# Altium PCB Pannel3.5x2 Ver1.0.PcbDoc (part 2 of 4)
Units mil, origin at the board's own origin, x right, y up, seen from the top; angles counter-clockwise.
Board outline 4133.86 x 2283.46 mil, 4 copper layers (SIGNAL, GROUND, PWR, SIGNAL (Bottom)), stack 61.627 mil thick; 222 components, 165 nets, 808 pads, 673 vias.
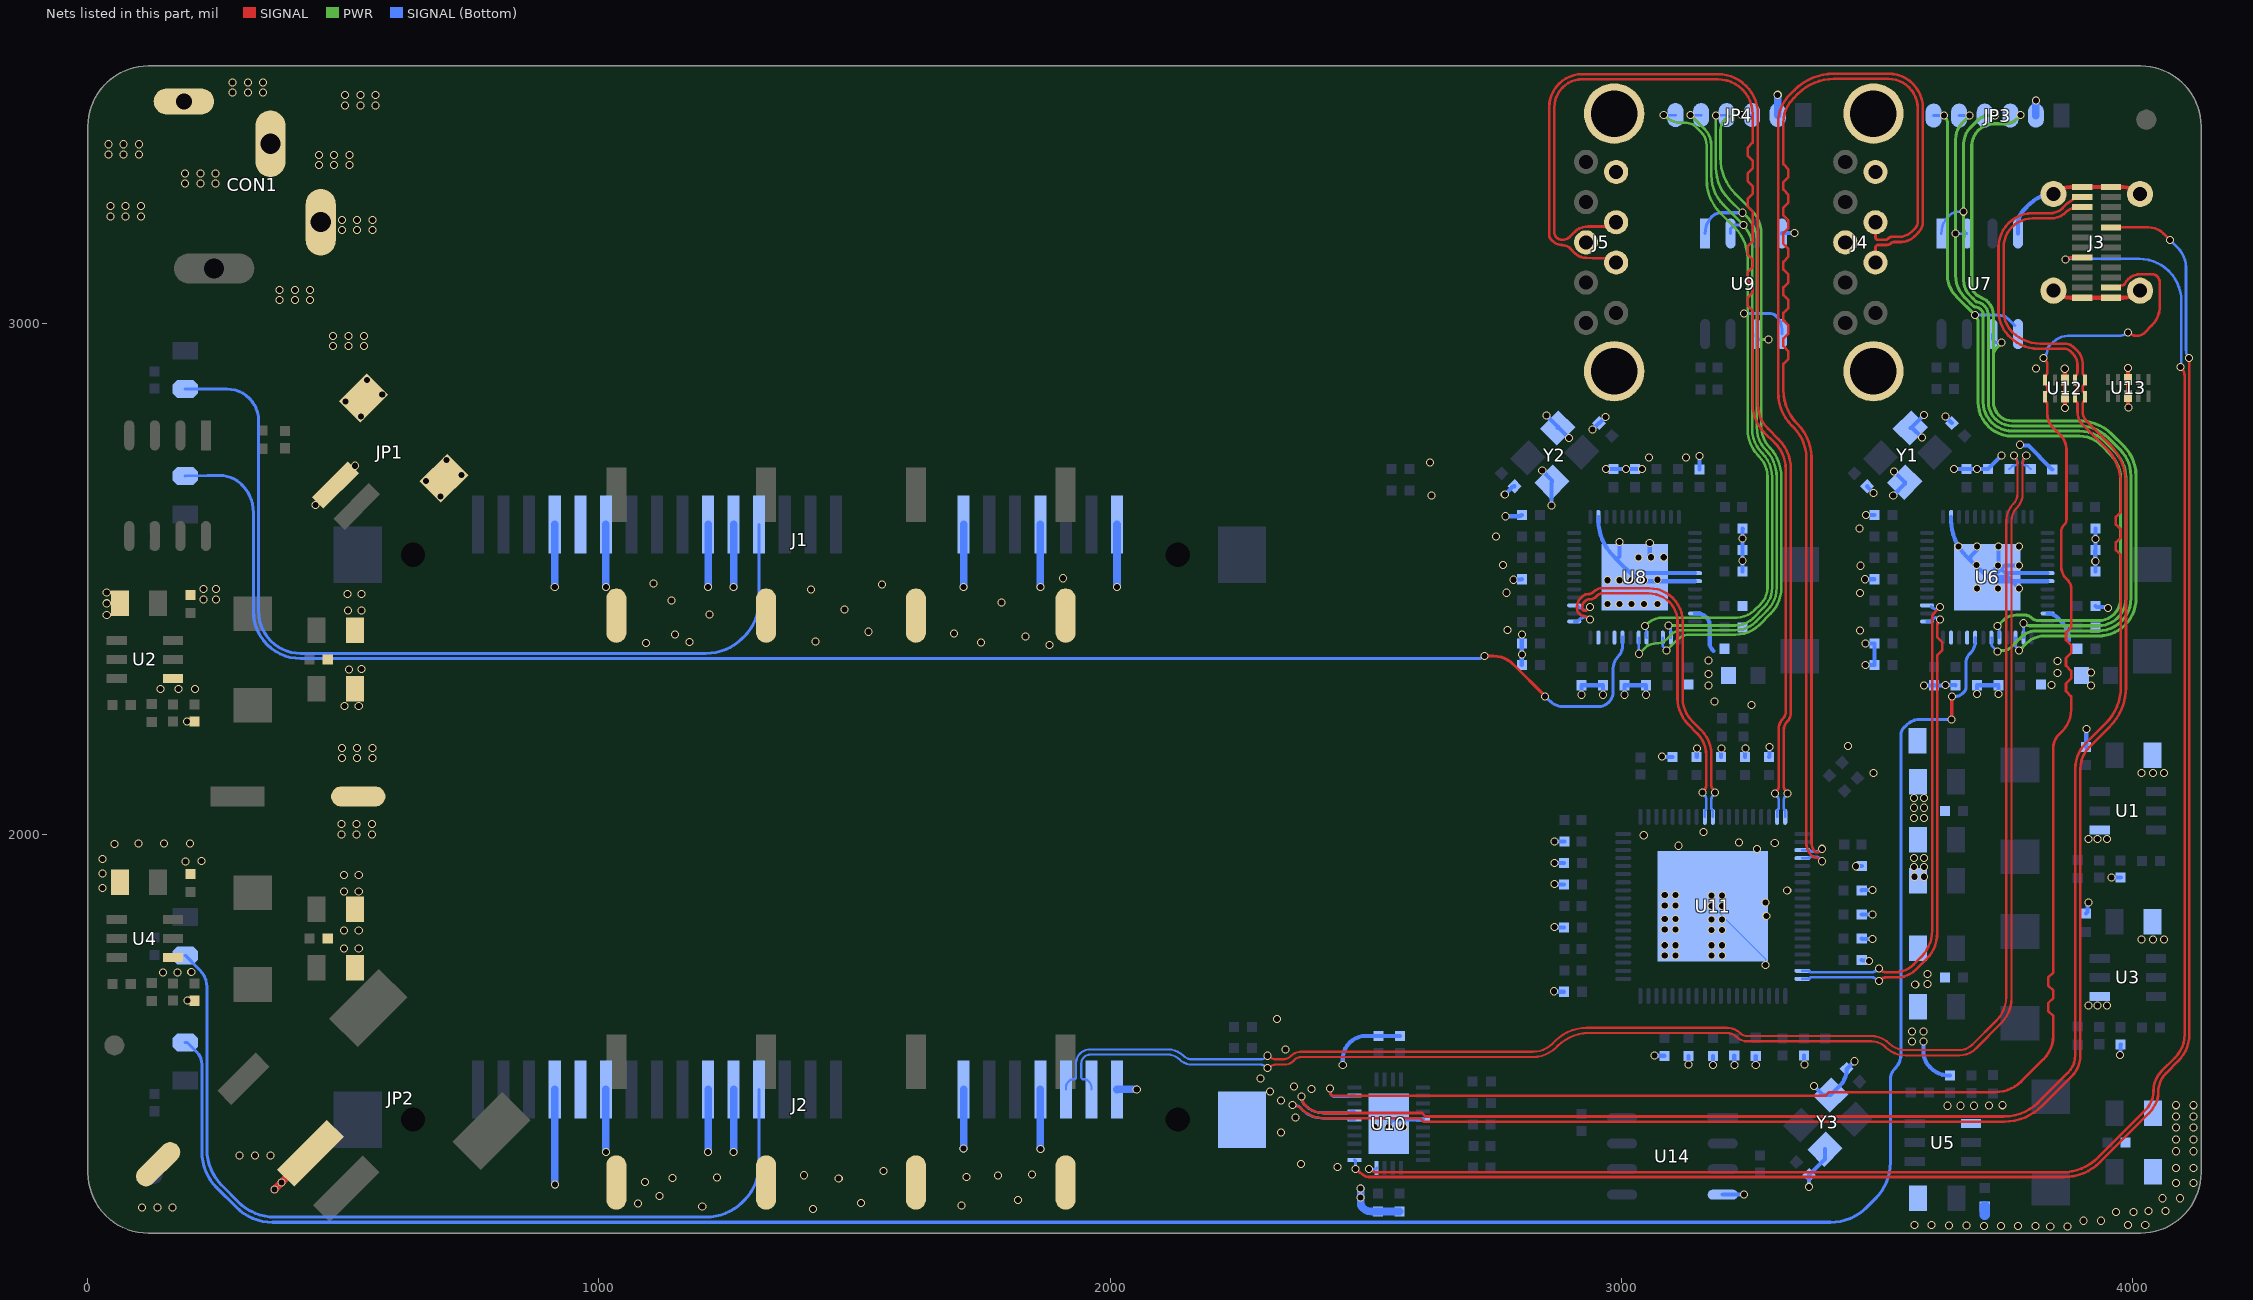
[diagram p4: the nets of this part, all layers, seen from the top]

## Via types
v1: diameter 15.75, hole 11.81, SIGNAL to SIGNAL (Bottom), tented both sides, 673 vias

## Nets (pads, with @x,y where several pads share a name; then routed paths per layer and width w, separated by ;. In a path a pad name is that pad's centre, name@x,y a point inside that pad or via, vN(x,y) a via of type N, cw(c..) or ccw(c..) an arc to the next point about the centre after c; other vN are vias at no path point) (continued)
cap_TX2_N: C40.1 J2.S3 | length 3089.5
  SIGNAL w4.29: v1(2308,1566.83) cw(c2308,1563.98) 2310.02,1565.99 ccw(c2325.04,1581.02) 2325.04,1559.77 2336.81,1559.77 ccw(c2336.81,1584.91) 2336.9,1559.77 ccw(c2336.81,1584.91) 2354.49,1567.04 ccw(c2336.81,1584.91) 2354.54,1567.09 ccw(c2336.81,1584.91) 2354.58,1567.13 cw(c2372.46,1549.18) 2372.46,1574.51 2826.91,1574.51 ccw(c2826.91,1629.09) 2865.5,1590.5 2871.01,1596.01 cw(c2932.53,1534.5) 2932.53,1621.5 3207.01,1621.5 cw(c3207.01,1585.17) 3232.7,1610.86 ccw(c3246.17,1624.33) 3232.74,1610.82 ccw(c3246.17,1624.33) 3246.17,1605.28 3489.55,1605.28 cw(c3489.55,1556.56) 3523.99,1591.01 ccw(c3555.87,1622.87) 3555.87,1577.8 3661,1577.8 ccw(c3661,1613.85) 3686.49,1588.36 3733.85,1635.72 ccw(c3687.56,1682) 3753.02,1682 3753.02,2612.97 cw(c3800.34,2612.97) 3766.88,2646.43 ccw(c3747.63,2665.69) 3774.86,2665.69 3774.86,2723.96 ccw(c3753.61,2723.96) 3768.63,2738.98 cw(c3770.65,2741) v1(3767.8,2741)
  SIGNAL (Bottom) w4.29: J2.S3@1913.43,1500.84 1913.43,1504.19 cw(c1929.93,1504.19) 1918.26,1515.86 1920.38,1517.98 cw(c1926.94,1511.43) 1926.94,1520.69 1929,1520.69 ccw(c1929,1524.98) 1930.35,1520.91 ccw(c1929,1524.98) 1932.03,1521.95 ccw(c1929,1524.98) 1933.07,1523.63 ccw(c1929,1524.98) 1933.29,1524.98 1933.29,1551.93 cw(c1960.59,1551.93) 1941.28,1571.24 1941.36,1571.32 ; 1941.4,1571.35 cw(c1960.61,1552.07) 1960.61,1579.29 2112.79,1579.29 cw(c2112.79,1535.68) 2143.61,1566.53 ; 2143.64,1566.5 ccw(c2159.91,1582.8) 2159.91,1559.77 2294.77,1559.77 ccw(c2294.77,1571.82) 2303.29,1563.3 2305.98,1565.99 cw(c2308,1563.98) v1(2308,1566.83) ; C40.1@3759,2714.43 3764.71,2720.14 cw(c3769.52,2715.32) 3769.52,2722.13 3770.56,2722.13 ccw(c3770.56,2726.42) 3771.92,2722.35 ccw(c3770.56,2726.42) 3773.6,2723.39 ccw(c3770.56,2726.42) 3774.63,2725.06 ccw(c3770.56,2726.42) 3774.86,2726.42 3774.86,2727.77 ccw(c3762.8,2727.77) v1@3771.33,2736.29
cap_TX2_P: C38.1 J2.S2 | length 3089.4
  SIGNAL w4.29: v1(2308,1542.42) ccw(c2308,1545.28) 2310.02,1543.26 cw(c2325.04,1528.23) 2325.04,1549.48 2341.2,1549.48 ccw(c2341.2,1574.3) 2358.75,1556.75 ; 2358.99,1556.99 2361.76,1559.76 cw(c2372.53,1548.99) 2372.53,1564.22 2827.02,1564.22 ccw(c2827.02,1628.83) 2872.7,1583.15 2875.28,1585.72 cw(c2936.79,1524.21) 2936.79,1611.21 3206.9,1611.21 cw(c3206.9,1584.9) 3225.5,1603.5 ccw(c3246.05,1624.05) 3246.05,1594.99 3489.42,1594.99 cw(c3489.42,1556.25) 3516.77,1583.68 cw(c3489.42,1556.25) 3516.81,1583.64 ccw(c3555.8,1622.71) 3555.8,1567.51 3661.06,1567.51 ccw(c3661.06,1613.7) 3693.72,1581.04 3742.86,1630.17 ccw(c3693.48,1679.55) 3763.31,1679.55 3763.31,2612.87 cw(c3800.59,2612.87) 3774.23,2639.23 ccw(c3747.87,2665.59) 3785.14,2665.59 3785.14,2723.96 cw(c3806.39,2723.96) 3791.37,2738.98 ccw(c3789.35,2741) v1(3792.2,2741)
  SIGNAL (Bottom) w4.29: J2.S2@1963.43,1500.84 1963.43,1504.19 ccw(c1946.93,1504.19) 1958.6,1515.86 1956.48,1517.98 ccw(c1949.93,1511.43) 1949.93,1520.69 1947.87,1520.69 cw(c1947.87,1524.98) 1944.83,1521.95 cw(c1947.87,1524.98) 1943.58,1524.98 1943.58,1551.89 cw(c1960.68,1551.89) 1948.59,1563.99 cw(c1960.68,1551.9) 1960.68,1569 2112.72,1569 cw(c2112.72,1535.51) 2136.39,1559.2 ccw(c2159.84,1582.63) 2136.46,1559.13 ccw(c2159.84,1582.63) 2159.76,1549.48 ccw(c2159.84,1582.63) 2159.84,1549.48 2294.77,1549.48 cw(c2294.77,1537.43) 2303.29,1545.95 2305.98,1543.26 ccw(c2308,1545.28) v1(2308,1542.42) ; v1@3788.67,2736.29 ccw(c3797.2,2727.77) 3785.14,2727.77 3785.14,2726.42 ccw(c3789.44,2726.42) 3785.37,2725.06 ccw(c3789.44,2726.42) 3786.4,2723.39 ccw(c3789.44,2726.42) 3788.08,2722.35 ccw(c3789.44,2726.42) 3789.44,2722.13 3790.48,2722.13 cw(c3790.48,2715.32) 3795.29,2720.14 C38.1@3801,2714.43
DAS1: J1.P11
DAS2: J2.P11
GND: C1.2 C2.2 C5.1 C6.1 C7.1 C8.1 C11.2 C12.2 C13.2 C14.2 C15.2 C16.2 C19.1 C20.1 C21.1 C22.1 C25.2 C26.2 C27.2 C28.2 C29.2 C31.1 C32.1 C34.2 C35.2 C45.1 C46.1 C47.1 C49.1 C50.1 C51.1 C52.1 C53.1 C54.1 C55.1 C56.1 C57.1 C58.1 C59.1 C60.1 C61.1 C62.1 C65.2 C66.2 C67.1 C68.1 C69.1 C71.1 C72.1 C73.1 C74.1 C75.1 C76.1 C77.1 C78.1 C79.1 C80.1 C81.1 C82.1 C83.1 C84.1 C87.2 C88.2 C89.1 C90.1 C91.2 C102.1 C103.1 C104.1 C105.1 C106.1 C107.2 C108.2 C109.1 C110.1 C111.1 C112.1 C113.1 C114.1 C115.1 C116.1 C117.1 C118.1 C119.1 C120.1 C121.2 C122.2 CON1.2 CON1.3 CON1.4 E1.2 E2.2 E3.2 E4.2 E5.2 E6.2 E7.2 E8.2 E9.2 E10.2 J1.P5 J1.P6 J1.P10 J1.P12 J1.S1 J1.S4 J1.S7 J2.P5 J2.P6 J2.P10 J2.P12 J2.S1 J2.S4 J2.S7 J2.SH1 J3.A1 J3.A12 J3.B1 J3.B12 J3.SH1 J3.SH2 J3.SH3 J3.SH4 J4.4 J4.7 J4.10 J4.11 J5.4 J5.7 J5.10 J5.11 JP1.0 JP1.2 JP2.2 JP3.2 JP4.2 R3.2 R4.2 R7.2 R8.2 R10.2 R18.1 R19.1 R24.1 R25.1 R32.2 R36.1 R37.1 R39.2 R42.2 U1.1 U2.1 U3.1 U4.1 U5.1 U6.26 U6.42 U6.43 U6.47 U6.49 U7.4 U8.26 U8.42 U8.43 U8.47 U8.49 U9.4 U10.19 U10.29 U11.77 U12.3 U12.8 U13.3 U13.8 U14.4 Y1.2 Y1.4 Y2.2 Y2.4 Y3.2 Y3.4 | length 6583.2
  SIGNAL w6: v1(193.77,2220.41) R4.2@209,2220.41 ; v1(194.75,1674.97) 208.43,1674.97 R8.2@209,1674.41 ; v1(445,2644) 484.13,2683.13 JP1.2@484.37,2683.13 485.13,2683.13 v1(523,2721)
  SIGNAL w8: J3.SH2@3845.35,3063.51 ccw(c3878.62,3096.78) 3878.62,3049.73 J3.B1@3901.65,3049.73 J3.A12@3958.34,3049.73 3981.38,3049.73 ccw(c3981.38,3096.78) J3.SH3@4014.64,3063.51 ; J3.SH1@3845.35,3252.49 cw(c3878.62,3219.22) 3878.62,3266.27 J3.B12@3901.65,3266.27 J3.A1@3958.34,3266.27 3981.38,3266.27 cw(c3981.38,3219.22) J3.SH4@4014.64,3252.49 ; v1(3867.52,2910.78) 3867.89,2910.41 U12.3@3867.89,2888.78 U12.8@3867.89,2855.91 3867.89,2834.28 v1(3868.26,2833.91) ; v1(3991.26,2911.87) 3991.63,2911.5 U13.3@3991.63,2889.87 U13.8@3991.63,2857 3991.63,2835.37 v1(3992,2835)
  SIGNAL w15: v1(365,1305) v1(379,1319) 435.75,1375.75 JP2.2@435.75,1376.13
  SIGNAL (Bottom) w2: U11.77@3179,1859 3201,1837 3282.34,1755.66 v1(3282.34,1744.63)
  SIGNAL (Bottom) w8: v1(2455,1548.38) 2455,1560.1 cw(c2500.63,1560.1) 2468.34,1592.34 cw(c2500.63,1560.1) 2500.63,1605.73 R37.1@2525,1605.73 R36.1@2567,1605.73 ; U10.29@2545,1434 2552.87,1441.87 U10.19@2611.93,1441.87 ; v1(2772,2665) 2785.75,2678.75 cw(c2791.05,2673.44) C88.2@2791.05,2680.95 ; v1(2773.29,2622.24) 2798.63,2622.24 ccw(c2798.63,2631.66) C71.1@2805.28,2625 ; v1(2789,2498) 2789.5,2498.5 2804.78,2498.5 C73.1@2805.28,2499 ; C82.1@2805.28,2331 v1(2805.28,2351.72) C74.1@2805.28,2373 v1(2805.28,2391.28) ; v1(2845.35,2711.65) 2864.43,2692.57 Y2.2@2864.43,2689.11 2863.04,2687.71 v1(2863.04,2642.96) ; v1(2854,2819) 2875.57,2797.43 Y2.4@2875.57,2794.89 2878.11,2794.89 v1(2897.65,2775.35) ; v1(2868,1693) ccw(c2870.41,1695.41) 2870.41,1692 C103.1@2887.57,1692 ; v1(2869,1819) ccw(c2871.41,1821.41) 2871.41,1818 C119.1@2887.57,1818 ; v1(2869,1903) ccw(c2871.41,1905.41) 2871.41,1902 C91.2@2887.57,1902 ; v1(2869,1944) C102.1@2887.57,1944 ; v1(2869,1986) R32.2@2888.54,1986 ; v1(2922,2273) C80.1@2922,2291.57 C77.1@2964,2291.57 v1(2964,2273) ; v1(2944,2792.03) C87.2@2956.47,2804.53 ; U8.26@2955.13,2621.11 2955.13,2615.29 ccw(c3055.13,2615.29) 2984.42,2544.58 U8.49@2991,2538 ; C87.2@2956.47,2804.53 2957.5,2804.53 v1(2968.97,2816) ; v1(2970.37,2714.43) C78.1@2985,2714.43 v1(3009.43,2714.43) C76.1@3027,2714.43 v1(3040.43,2714.43) ; v1(2996.18,2572.2) 2996.18,2543.18 U8.49@2991,2538 ; v1(3006,2273) C81.1@3006,2291.57 C75.1@3048,2291.57 v1(3048,2273) ; v1(3055.64,2570.12) 3055.64,2545.36 U8.49@3060,2541 ; v1(3065,1567) 3065.22,1566.78 3084.28,1566.78 C112.1@3084.5,1566.57 ; v1(3080,2152) ccw(c3081.37,2153.37) 3081.37,2151.43 C116.1@3100.3,2151.43 ; v1(3131,1550) 3131.4,1550.4 3131.4,1566.17 C117.1@3131.8,1566.57 ; U8.47@3144.11,2432.13 3147.36,2432.13 cw(c3147.36,2404.36) 3167,2424 cw(c3152.29,2409.29) 3173.09,2409.29 3173.09,2370.29 ccw(c3199.99,2378.99) 3180,2359 ; U8.43@3144.11,2495.13 3045.01,2495.13 cw(c3045.01,2522.01) U8.49@3026,2503 ; U8.42@3144.11,2510.87 3045.01,2510.87 ccw(c3045.01,2483.99) U8.49@3026,2503 ; C109.1@3147.5,2151.43 3147.5,2166.79 cw(c3149.21,2166.79) v1(3148,2168) ; R25.1@3153,2713.32 v1(3153,2740) ; v1(3179,1549) C110.1@3179,1566.57 ; C120.1@3194.7,2151.43 3195.14,2151.87 3195.14,2167.41 v1(3195.58,2167.85) ; U14.4@3198.43,1295 v1(3240,1295) ; v1(3221,1549) R39.2@3221,1567.43 ; C72.1@3237.44,2514 3237.33,2514.11 3237.33,2535.11 v1(3237.22,2535.22) 3237.22,2555.78 C83.1@3237.44,2556 v1(3237.44,2578.56) 3237.44,2596.87 3238,2597.44 C67.1@3237.44,2598 ; C111.1@3242,2151.43 3242,2169.59 cw(c3245.41,2169.59) 3243,2172 v1(3243,2167.85) ; v1(3263,1549) C106.1@3263,1566.57 ; C104.1@3289.2,2151.43 ccw(c3287.27,2153.36) 3290,2153.36 v1(3290,2171) ; U9.4@3314,3175.43 3314.57,3176 v1(3339,3176) ; R42.2@3357,1567.43 3357.5,1566.93 3357.5,1550.5 v1(3358,1550) ; v1(3367.53,1310.47) C108.2@3367.53,1333.47 3398.43,1364.38 Y3.2@3398.43,1384.11 ; v1@3376.53,1507.9 v1@3377.64,1509 ; v1(3377,1507.43) 3394.54,1489.89 Y3.4@3409.57,1489.89 3427.09,1507.41 ccw(c3393.5,1541) 3440.38,1533.36 C107.2@3441,1541 v1(3456,1556) ; v1(3458.72,1937.55) 3458.79,1937.63 3470.36,1937.63 C105.1@3470.43,1937.7 ; C115.1@3470.43,1754 3471.38,1753.06 3483.61,1753.06 v1(3484.56,1752.11) ; C118.1@3470.43,1796 3470.93,1795.5 3490.5,1795.5 v1(3491,1795) ; C113.1@3470.43,1843.3 3470.58,1843.15 3490.85,1843.15 v1(3491,1843) ; C114.1@3470.43,1890.5 3470.68,1890.75 3490.75,1890.75 v1(3491,1891) ; v1@3475,2374 ccw(c3477.41,2376.41) v1(3477.41,2373) C53.1@3495.28,2373 C62.1@3495.28,2331 v1(3478,2331) ; v1(3476.41,2499) C56.1@3495.28,2499 ; v1(3478.41,2625) C54.1@3495.28,2625 ; C66.2@3481.05,2680.95 3481.05,2680.45 3493,2668.5 v1(3493,2668) ; v1(3532,2663) 3554.43,2685.43 Y1.2@3554.43,2689.11 3553.89,2689.11 v1(3533.35,2709.65) ; Y1.4@3565.57,2794.89 Y1.4@3566.89,2794.89 ; v1(3588.17,2775.87) 3569.15,2794.89 Y1.4@3566.89,2794.89 ; v1(3591,1595) 3591,1576 ccw(c3636.87,1576) 3604.41,1543.59 ; v1(3592,2820) Y1.4@3566.89,2794.89 ; v1(3592.52,2291) 3592.81,2291.28 3611.72,2291.28 C58.1@3612,2291.57 3612.28,2291.28 v1@3634.43,2291.28 ; 3604.44,1543.56 ccw(c3642.35,1581.48) 3642.35,1527.86 R10.2@3643,1527.86 ; v1(3634,2292) 3634.22,2291.78 3653.78,2291.78 C52.1@3654,2291.57 ; v1(3634,2817) C65.2@3646.47,2804.53 ; U6.26@3645.13,2621.11 3645.13,2615.29 ccw(c3745.13,2615.29) 3674.42,2544.58 U6.49@3683,2536 ; v1(3650.56,2714.56) 3650.62,2714.49 3674.94,2714.49 C55.1@3675,2714.43 v1(3696,2714.43) C49.1@3717,2714.43 v1@3741.89,2739.32 ; v1(3695.84,2274.75) 3695.92,2274.83 3695.92,2291.49 C61.1@3696,2291.57 C51.1@3738,2291.57 v1(3738,2274.75) ; v1(3695.84,2563) 3695.84,2555.92 3683,2543.08 U6.49@3683,2536 ; v1(3737,2526) 3732.04,2521.04 U6.49@3732.04,2519.04 ; U6.49@3738,2525 v1(3738,2563) ; v1@3741.9,2739.33 ccw(c3739.22,2742) v1@3743,2742 ; v1@3742.5,2742.5 v1@3744,2744 ; U7.4@3776,3175.43 3776,3193.83 cw(c3814.53,3193.83) 3787.29,3221.07 3799.86,3233.64 cw(c3845.35,3188.15) J3.SH1@3845.35,3252.49 ; v1(3778.33,2481) U6.49@3764.2,2495.13 ; v1(3778.33,2526) 3750.14,2526 U6.49@3743.18,2519.04 ; v1(3780,2762.14) 3781.48,2760.66 3796.41,2760.66 3818.18,2738.89 3818.18,2738.15 R19.1@3843,2713.32 ; U6.47@3834.11,2432.13 cw(c3834.11,2406.14) 3849.21,2427.3 3850.89,2426.1 cw(c3843.95,2416.39) 3853.37,2423.72 ccw(c3859.66,2428.67) 3853.97,2423.04 3860.44,2416.58 cw(c3822.86,2379) 3863.54,2413.19 cw(c3822.86,2379) 3874.54,2391.35 cw(c3822.86,2379) 3876,2379.02 ; U6.43@3834.11,2495.13 U6.49@3764.2,2495.13 ; U6.42@3834.11,2510.87 3751.34,2510.87 U6.49@3743.18,2519.04 ; C20.1@3909,1844.72 3912.1,1847.82 3912.1,1865.52 v1(3913.58,1867) ; C6.1@3909,2170.72 3909.5,2171.22 3909.5,2205.5 v1(3910,2206) ; C57.1@3927.44,2447 3930.04,2444.39 3950.78,2444.39 v1(3952.26,2442.91) ; C50.1@3927.44,2514 3927.33,2514.11 3927.33,2534.11 v1(3927.22,2534.22) 3927.22,2555.78 C60.1@3927.44,2556 3927.72,2556.28 3927.72,2577.72 v1(3928,2578) 3927.72,2578.28 3927.72,2597.72 C45.1@3927.44,2598 ; v1(3958.72,1915.57) 3958.93,1915.36 3976.79,1915.36 R3.2@3977,1915.14 ; v1(3976,1568) 3976.5,1568.5 3976.5,1588.64 R7.2@3977,1589.14 ; U8.49@2991,2538 U8.49@3026,2503 ; U6.49@3683,2536 U6.49@3716,2503 ; U6.49@3716,2503 3723.87,2495.13 U6.49@3764.2,2495.13 ; U6.49@3716,2503 3756.33,2503 U6.49@3764.2,2495.13 ; U6.49@3716,2503 U6.49@3722.13,2509.13 ; U6.49@3722.13,2509.13 U6.49@3732.04,2519.04 ; U6.49@3722.13,2509.13 3733.26,2509.13 U6.49@3743.18,2519.04 ; U6.49@3732.04,2519.04 U6.49@3743.18,2519.04
  SIGNAL (Bottom) w15: J2.P12@913.43,1500.84 913.43,1315.77 914,1315.2 v1(914,1315) ; v1(913.43,2483.97) J1.P12@913.43,2606.09 ; v1(1013.43,1378.72) J2.P10@1013.43,1500.84 ; v1(1013.43,2483.97) J1.P10@1013.43,2606.09 ; v1(1213.43,1378.72) J2.P6@1213.43,1500.84 ; v1(1213.43,2483.97) J1.P6@1213.43,2606.09 ; v1(1263.43,1378.72) J2.P5@1263.43,1500.84 ; v1(1263.43,2483.97) J1.P5@1263.43,2606.09 ; v1(1713,1385) 1713,1385.2 1713.43,1385.63 J2.S7@1713.43,1500.84 ; v1(1713.43,2483.97) J1.S7@1713.43,2606.09 ; J2.S4@1863.43,1500.84 1863.43,1384.77 1864,1384.2 v1(1864,1384) ; v1(1863.43,2483.97) J1.S4@1863.43,2606.09 ; J2.S1@2013.43,1500.84 2013.59,1501 v1(2052,1501) ; v1(2013.43,2483.97) J1.S1@2013.43,2606.09 ; v1(2490,1307) v1(2490,1289.87) 2490,1279.45 ccw(c2504.55,1279.45) 2494.26,1269.16 ccw(c2511.47,1286.36) 2511.47,1262.03 C90.1@2524,1262.03 C89.1@2566,1262.03 ; JP4.2@3306,3407 v1(3306,3446.8) ; JP3.2@3811,3406 v1(3811,3436)
  SIGNAL (Bottom) w20: 3711,1255.83 C32.1@3711,1272.28
  other v1: 3839.17,1232.5 3873.17,1232.5 3709.17,1233.5 3743.17,1233.5 3776.17,1233.5 3810.17,1233.5 3641.17,1234.5 3675.17,1234.5 3573.17,1235.5 3607.17,1235.5 3991,1236 4025,1236 3904,1244 3938,1244 3968,1261 4002,1261 4031,1263 4065,1263 1419,1267 106,1270 136,1270 166,1270 1202,1272 1708.78,1274.01 1076,1278 1513,1279 1819.98,1284.6 4059,1288 4093,1288 1118.45,1292.41 4085,1318 4119,1318 1090,1320 1469,1327 1144,1328 1230.77,1328.64 1719.09,1329.76 1401,1333 1780.68,1332.82 1847.02,1334.5 1557,1341 4085,1347 4119,1347 2444.98,1348.78 2373.23,1355.4 297,1372 327,1372 357,1372 4085,1380 4119,1380 4085,1403 4119,1403 2334.46,1416.36 4085,1426 4119,1426 2517,1427 2545,1427 2574,1427 2362.27,1446.2 4085,1448 4119,1448 3638,1469 3664,1469 3690,1469 3719,1469.57 3746,1470 4085,1470 4119,1470 2334.3,1478.91 2312.28,1496.57 2394.13,1501.53 2359.87,1506.99 2293.9,1522.5 2343,1579 3569,1595 3569,1614 3591,1614 2326.01,1638.59 3914,1665 3932,1665 3950,1665 3575,1706 3599,1707 3599,1727 147,1730 175,1730 202.36,1730.36 3085,1763 3106,1763 3176,1763 3197,1763 501,1777 530,1777 3085,1783 3106,1783 3176,1783 3197,1783 4018,1794 4040,1794 4062,1794 501,1812 530,1812 3176,1813 3197,1813 3085,1814 3106,1814 3176,1833 3197,1833 3085,1834 3106,1834 3283.59,1839.84 3176,1860 3197,1860 3085,1861 3106,1861 3281.86,1866.85 3176,1880 3197,1880 3085,1881 3106,1881 501,1888 530,1888 3324.58,1890.47 29,1895 3573.5,1916.99 3592.5,1916.99 501,1920 530,1920 29,1923 3573,1936 3592,1936 191,1947 222,1948 29,1952 3573,1954 3592,1954 3265.66,1971.63 3112.11,1977.59 52,1981 99,1982 149,1982 200,1982 3300.17,1983.4 3230.49,1984.03 3914,1991 3932,1991 3950,1991 3043.91,1998.2 496,2000 526,2000 556,2000 3160.35,2004.82 496,2020 526,2020 556,2020 3573,2032 3592,2032 3573,2052 3592,2052 3573,2071 3592,2071 3493.55,2119.87 4018,2120 4040,2120 4062,2120 497,2149 527,2149 557,2149 497,2169 527,2169 557,2169 3443.11,2172.89 502,2251 530,2251 3254.61,2252.9 3182.37,2259.87 142,2284 177,2284 210,2284 3171,2291 3918.87,2291.28 3842,2292 3171,2314 3853,2316 3919,2317 511,2322 535,2323 3853,2339 3171,2340 1881,2370 1092,2374 1747.24,2375.48 1177,2376 1423.12,2377.1 1834,2387 1149,2391 1694.41,2393.25 1527.16,2396.25 2777,2399.39 3467,2398.96 37,2429 1216,2430 509,2438 535,2438 1480,2440 2973,2451 2996,2451 3020,2451 3044,2451 3071,2451 37,2452 1787.84,2453.92 1142,2457 226,2459 251,2459 508,2470 535,2470 3467.01,2472.19 37,2473 2775.7,2472.58 1415,2479 226,2480 251,2480 3695.84,2481 3737,2481 1554,2489 1107,2491 2973,2497 2996,2497 3020,2497 3044,2497 3071,2498 1907.8,2500.98 3468.23,2525.42 2768.77,2527.2 3695,2527 3033.4,2541.6 3058,2542 3083,2542 3660,2563 3778.33,2563 2755.15,2582.78 3465.93,2598.59 690,2661 2629.04,2662.57 662,2691 731,2703 2625.72,2727.62 702,2732 3053.88,2737.11 3126.12,2737.11 3743.39,2741 534,2817 504,2847 576,2860 546,2889 3811.39,2911.55 480,2955 510,2955 540,2955 480,2975 510,2975 540,2975 375,3045 405,3045 435,3045 375,3065 405,3065 435,3065 497,3182 527,3182 557,3182 497,3202 527,3202 557,3202 44,3209 74,3209 104,3209 44,3229 74,3229 104,3229 190,3273 220,3273 250,3273 190,3293 220,3293 250,3293 452,3309 482,3309 512,3309 452,3329 482,3329 512,3329 40,3330 70,3330 100,3330 40,3350 70,3350 100,3350 503,3426 533,3426 563,3426 503,3446 533,3446 563,3446 283,3451 313,3451 343,3451 283,3471 313,3471 343,3471
GPIO0-B: JP3.5 U6.2 U7.2 | length 1491.7
  PWR w6: v1(3681.38,3406) 3667.62,3392.24 ccw(c3700.84,3359.02) 3653.86,3359.02 3653.86,3175.14 v1(3654,3175) 3654,3093.65 ccw(c3716.13,3093.65) 3672.2,3049.72 3681.54,3040.38 ; 3681.57,3040.35 ccw(c3702.84,3061.58) 3681.62,3040.3 ccw(c3702.84,3061.58) 3681.77,3040.14 3688.82,3033.22 ccw(c3693.02,3037.51) 3692.73,3031.51 cw(c3692.13,3015.65) 3703.33,3026.89 ; 3703.37,3026.86 cw(c3692.13,3015.65) 3708,3015.65 cw(c3692.13,3015.65) 3707.95,3014.4 ccw(c3713.93,3013.96) 3707.93,3013.96 3707.99,3002.03 cw(c3677.94,3001.47) 3708,3001.47 3708,2845.58 ccw(c3764.58,2845.58) 3724.57,2805.57 ccw(c3764.58,2845.58) 3764.58,2789 3889,2789 3896.25,2789 cw(c3896.26,2719.26) 3945.54,2768.61 cw(c3896.26,2719.26) 3945.6,2768.54 3966.29,2747.85 cw(c3916.34,2697.9) 3986.98,2697.9 3986.98,2461.57 cw(c3933.41,2461.57) 3971.29,2423.69 ; v1(3787.01,2412.94) ccw(c3798.94,2424.87) 3793.78,2408.81 ccw(c3798.94,2424.87) 3798.94,2408 3933.41,2408 ccw(c3933.41,2461.57) 3971.27,2423.67
  SIGNAL (Bottom) w5: v1(3654,3175) 3675.57,3175 U7.2@3676,3175.43 ; U6.2@3786.87,2384.89 3786.94,2384.96 3786.94,2412.87 v1(3787.01,2412.94)
  SIGNAL (Bottom) w6: JP3.5@3661,3406 v1(3681.38,3406)
GPIO0-C: JP4.5 U8.2 U9.2 | length 1290.4
  PWR w5: v1(3092.44,2408.48) 3223.19,2408.48 ccw(c3223.19,2456.81) 3257.35,2422.62 ; v1(3135.62,3407) 3162.81,3379.81 cw(c3130.97,3347.97) 3176,3347.97 3176,3289.38 ccw(c3258.38,3289.38) 3200.11,3231.15 v1@3237,3194.26 ; v1@3238,3192 cw(c3194.54,3148.54) 3251.01,3172.8 cw(c3194.54,3148.54) 3256,3148.54 3256,2793.03 ccw(c3322.58,2793.03) 3275.5,2745.95 cw(c3228.73,2699) 3275.57,2745.88 ; 3257.36,2422.64 3279.36,2444.64 ; 3275.61,2745.84 cw(c3228.73,2699) 3295,2699 3295,2482.38 cw(c3241.62,2482.38) 3279.38,2444.65
  SIGNAL (Bottom) w5: v1@3096.32,2401.7 3096.32,2396.06 3096.87,2395.51 U8.2@3096.87,2384.89 ; v1(3135.62,3407) JP4.5@3156,3407
  SIGNAL (Bottom) w6: U9.2@3214,3175.43 3214,3185.32 3220.32,3191.64 v1(3238.6,3191.64)
GPIO1-B: JP3.3 U6.3 U7.6 | length 1609.7
  PWR w6: 3728,3013.53 3728,2938 ; 3728,3015.65 ccw(c3692.13,3015.65) 3717.54,3040.97 ccw(c3692.13,3015.65) 3717.49,3041.02 3713.71,3044.8 3709.09,3047.26 ccw(c3692.13,3015.65) 3708.9,3047.36 3696.72,3053.85 cw(c3699.55,3059.14) 3695.32,3054.88 3692.14,3058.06 cw(c3707.92,3073.84) 3685.6,3073.84 3685.6,3346.56 cw(c3729.17,3346.56) 3698.37,3377.37 cw(c3729.17,3346.56) 3729.17,3390.13 3752.57,3390.13 ccw(c3752.57,3418.93) 3772.93,3398.55 v1(3781.38,3407) ; v1@3744.5,2961.5 3732.95,2949.95 ccw(c3744.9,2938) 3728,2938 ; v1(3778.33,2359.42) 3792.62,2373.71 ; 3792.65,2373.74 cw(c3827.12,2339.2) 3827.12,2388 3933.41,2388 ccw(c3933.41,2461.57) 3985.4,2409.52 ; 3896.21,2809 3884,2809 3764.58,2809 cw(c3764.58,2845.58) 3738.71,2819.71 cw(c3764.58,2845.58) 3728,2845.58 3728,2938 ; 3896.26,2809 cw(c3896.26,2719.26) 3959.64,2782.79 cw(c3896.26,2719.26) 3959.75,2782.68 3982.85,2759.58 cw(c3924.71,2701.37) 3982.94,2759.49 cw(c3924.71,2701.37) 4006.98,2701.41 4007,2688 4007,2461.62 cw(c3933.36,2461.62) 3985.43,2409.55
  SIGNAL (Bottom) w5: U6.3@3771.12,2384.89 3771.12,2367.72 3778.33,2360.51 v1(3778.33,2359.42)
  SIGNAL (Bottom) w6: U7.6@3726,2978.57 3726,2968.32 3732.32,2962 v1(3744,2962)
GPIO1-C: JP4.3 U8.3 U9.6 | length 1369.1
  PWR w5: v1(3088.33,2359.42) 3109.96,2381.04 cw(c3132.74,2358.26) 3132.74,2390.48 3223.19,2390.48 ccw(c3223.19,2456.81) 3270.06,2409.88 ; v1(3235.62,3407) 3223.02,3407 ccw(c3223.02,3377.98) 3202.51,3398.51 ccw(c3223.02,3377.98) 3194,3377.98 3194,3323.42 ccw(c3294,3323.42) 3223.29,3252.71 3254,3222 cw(c3205.72,3173.72) 3274,3173.72 3274,2968 ; 3270.09,2409.91 3292.09,2431.91 ccw(c3241.62,2482.38) 3292.14,2431.96 ccw(c3241.62,2482.38) 3313,2482.38 3313,2699 ccw(c3228.73,2699) 3305.97,2732.69 3304.61,2735.82 ccw(c3244.67,2709.84) 3290.9,2756 cw(c3331.72,2796.81) 3290.83,2756.07 cw(c3331.72,2796.81) 3274,2796.81 3274,2968 ; v1(3288,2968) 3274,2968
  SIGNAL (Bottom) w5: U8.3@3081.12,2384.89 3081.12,2367.72 3088.33,2360.51 v1(3088.33,2359.42) ; v1(3235.62,3407) JP4.3@3256,3407
  SIGNAL (Bottom) w6: U9.6@3264,2978.57 3264,2974.32 3270.32,2968 v1(3288,2968)
GPIO2-B: JP3.6 U6.5 U7.5 | length 1585.2
  PWR w6: v1(3631.38,3406) cw(c3615.39,3390.01) 3635.74,3399.88 cw(c3615.39,3390.01) 3638,3390.01 3638,3093.66 ccw(c3695.66,3093.66) 3654.89,3052.89 v1(3692.13,3015.65) cw(c3677.94,3001.47) 3696.86,3008.14 cw(c3677.94,3001.47) 3698,3001.47 3698,2845.58 ccw(c3764.58,2845.58) 3717.5,2798.5 ccw(c3764.58,2845.58) 3764.58,2779 3896.26,2779 cw(c3896.26,2719.26) 3938.5,2761.5 3957.74,2742.26 cw(c3911.29,2695.81) 3976.98,2695.81 3976.98,2461.57 cw(c3933.41,2461.57) 3964.22,2430.76 cw(c3933.41,2461.57) 3933.41,2418 3815.65,2418 cw(c3815.65,2436.46) 3802.61,2423.39 ccw(c3789.54,2410.35) 3789.54,2428.82 3772.34,2428.82 ccw(c3772.34,2392.64) 3746.76,2418.22 v1(3736.16,2407.62)
  SIGNAL (Bottom) w5: v1(3736.16,2407.62) 3736.16,2404.72 3739.07,2401.81 3739.07,2385.44 U6.5@3739.62,2384.89
  SIGNAL (Bottom) w6: JP3.6@3611,3406 v1(3631.38,3406) ; v1(3692.13,3015.65) 3738.84,3015.65 cw(c3738.84,2990.43) 3756.67,3008.26 U7.5@3769.68,2995.26
GPIO2-C: JP4.6 U8.5 U9.5 | length 1448.8
  PWR w5: v1(3046.16,2407.62) 3048.54,2409.99 cw(c3082,2376.53) 3082,2423.86 3225.85,2423.86 ccw(c3225.85,2472.15) 3260,2438 3273,2451 ccw(c3241.62,2482.38) 3286,2482.38 3286,2699 ccw(c3228.73,2699) 3269.23,2739.5 3267.79,2740.94 ; v1(3083,3407) v1@3084.27,3405.73 ; v1@3084.28,3405.72 ccw(c3118.32,3439.78) 3118.32,3391.63 3128.3,3391.63 cw(c3128.3,3367.55) 3145.32,3384.57 3156.16,3373.73 cw(c3129.99,3347.57) 3167,3347.57 3167,3280.89 ccw(c3260.89,3280.89) 3194.5,3214.5 3222,3187 cw(c3161.64,3126.64) 3222.04,3186.96 cw(c3161.64,3126.64) 3247,3126.64 v1@3247,3019.08 ; v1@3247,3017 3247,2793.03 ccw(c3322.58,2793.03) 3267.15,2741.65 3267.27,2741.52 cw(c3263.6,2738.12) 3267.36,2741.42 3267.79,2740.94 ; 3274.99,2732.76 3267.79,2740.94
  PWR w6: v1(3239.89,3019.08) 3241.76,3017.21 3246.29,3017.21 v1@3246.5,3017
  SIGNAL (Bottom) w5: v1@3049.07,2401.81 3049.07,2385.44 U8.5@3049.62,2384.89 ; v1(3083,3407) JP4.6@3106,3407
  SIGNAL (Bottom) w6: v1(3239.89,3019.08) 3290.06,3019.08 cw(c3290.06,3000.09) 3303.47,3013.53 ; 3303.48,3013.52 cw(c3278.1,2988.13) 3314,2988.13 U9.5@3314,2978.57
GPIO3-B: JP3.4 U6.6 U7.1 | length 1648.9
  PWR w6: 3688.27,3047.79 3682.12,3053.94 cw(c3712.08,3083.87) 3669.73,3083.87 3669.73,3168.28 3669.87,3168.42 3669.87,3181.58 3669.73,3181.72 v1(3669.73,3217.98) 3669.73,3350.43 cw(c3716.33,3350.43) 3683.38,3383.38 3697.03,3397.03 cw(c3718.69,3375.37) 3718.69,3406 v1(3731.38,3406) ; 3688.32,3047.74 3690.86,3045.24 3691.05,3045.05 ; 3691.11,3044.99 3693.4,3042.74 ccw(c3697.57,3047.06) 3696.5,3041.15 cw(c3692.13,3015.65) 3710.42,3033.95 ; 3710.46,3033.91 cw(c3692.13,3015.65) 3718,3015.65 cw(c3692.13,3015.65) 3717.95,3014.01 ccw(c3723.94,3013.64) 3717.94,3013.62 3717.96,3008.05 ; 3718,3008.05 3718,2845.58 ccw(c3764.58,2845.58) 3731.64,2812.64 ; 3731.67,2812.61 ccw(c3764.58,2845.58) 3764.58,2799 3886,2799 3896.25,2799 cw(c3896.26,2719.26) 3952.58,2775.7 cw(c3896.26,2719.26) 3952.64,2775.64 3954.64,2773.64 3975.81,2752.47 ; v1(3736.16,2357.58) 3738.03,2359.44 3747,2359.44 ccw(c3747,2380.95) 3762.19,2365.73 3771.75,2375.29 3771.81,2375.29 3783.17,2386.64 cw(c3810.58,2359.23) 3800.92,2396.78 cw(c3810.58,2359.23) 3810.58,2398 3933.41,2398 ccw(c3933.41,2461.57) 3978.35,2416.61 ; 3975.85,2752.44 cw(c3924.71,2701.37) 3996.98,2701.37 3996.98,2461.57 cw(c3933.41,2461.57) 3978.37,2416.63
  SIGNAL (Bottom) w5: U7.1@3626,3175.43 cw(c3673.52,3175.43) 3633.34,3200.8 cw(c3673.52,3175.43) 3639.92,3209.03 3641.54,3210.65 cw(c3659.3,3192.86) 3659.3,3218 v1(3669.73,3217.98) ; U6.6@3723.87,2384.89 3724.37,2384.39 3724.37,2369.37 v1(3736.16,2357.58)
  SIGNAL (Bottom) w6: JP3.4@3711,3406 v1(3731.38,3406)
GPIO3-C: JP4.4 U8.6 U9.1 | length 1440.1
  PWR w5: v1(3034.92,2353.22) 3046.11,2364.41 cw(c3067.85,2342.67) 3067.85,2373.41 ccw(c3067.85,2404.16) 3089.59,2382.42 3098.12,2390.95 cw(c3118.72,2370.35) 3118.72,2399.48 3223.19,2399.48 ccw(c3223.19,2456.81) 3263.69,2416.24 ; v1(3185.62,3406.5) 3185.01,3390.36 ccw(c3194,3390) 3185,3390 3185,3304.77 ccw(c3273.77,3304.77) 3211,3242 v1(3237,3216) 3237.74,3216 3244.87,3208.87 3247.87,3205.87 ; 3247.89,3205.86 cw(c3237,3195) 3249.25,3204.29 3251.37,3201.49 cw(c3198.02,3161) 3264.5,3169.18 3264.69,3167.62 cw(c3223.57,3162.57) 3265,3162.57 3265,2796.76 ccw(c3331.58,2796.76) 3284.5,2749.68 ; 3263.73,2416.27 3283.86,2436.41 ccw(c3235.25,2485.02) 3283.9,2436.44 3285.7,2438.24 ccw(c3241.62,2482.38) 3285.76,2438.31 ccw(c3241.62,2482.38) 3304,2482.38 3304,2699 ccw(c3228.73,2699) 3297.78,2728.97 ; 3284.52,2749.65 cw(c3244.67,2709.84) 3296.34,2732.28 3297.77,2728.97
  SIGNAL (Bottom) w5: U8.6@3034.4,2384.37 3034.4,2353.74 v1(3034.92,2353.22) ; v1(3185.62,3406.5) 3205.5,3406.5 JP4.4@3206,3407
  SIGNAL (Bottom) w6: U9.1@3164,3175.43 3164,3175.5 cw(c3211.34,3175.5) 3170.84,3200.02 cw(c3211.34,3175.5) 3177.84,3208.95 ; 3177.87,3208.98 cw(c3194.82,3192.02) 3194.82,3216 v1(3237,3216)
GPIO4-B: LED2.2 U6.8 | length 4807.8
  SIGNAL w6: v1(3645.85,2224.93) 3646.42,2225.5 3646.42,2269.27 v1(3647,2269.85)
  SIGNAL (Bottom) w6: LED2.2@190.61,1592.84 194.36,1592.84 212.96,1574.24 cw(c188.72,1550) 223,1550 223,1379.42 ccw(c323,1379.42) 252.29,1308.71 290.71,1270.29 ccw(c361.42,1341) 361.42,1241 3409.26,1241 ccw(c3409.26,1341) 3479.97,1270.29 3496.92,1287.23 ccw(c3426.2,1357.94) 3526.2,1357.94 3526.2,1518.38 cw(c3561.63,1518.38) 3536.57,1543.43 ; 3536.59,1543.45 ccw(c3511.23,1568.79) 3547.08,1568.79 3547.08,2195.08 cw(c3565.91,2195.08) 3552.6,2208.39 3558.11,2213.9 cw(c3584.73,2187.29) 3584.73,2224.93 v1(3645.85,2224.93) ; v1(3647,2269.85) 3653.29,2269.85 ccw(c3653.29,2290.56) 3667.93,2275.92 3670.97,2278.95 ccw(c3663.64,2286.27) 3674,2286.27 3674,2333 cw(c3705.37,2333) 3683.18,2355.18 ccw(c3661.01,2377.37) 3692.38,2377.37 U6.8@3692.38,2384.89
GPIO4-C: LED4.2 U8.8 | length 3248.7
  SIGNAL w6: v1(2731.96,2348.61) 2750.37,2348.61 cw(c2750.37,2295.45) 2772.02,2344 cw(c2750.37,2295.45) 2787.96,2333.04 v1(2851,2270)
  SIGNAL (Bottom) w6: LED4.2@190.61,2700.82 234.36,2702.13 257.42,2702.13 cw(c257.42,2639.9) 298.7,2686.47 301.26,2683.9 301.42,2683.9 cw(c246.91,2629.39) 324,2629.39 324,2436.18 ccw(c416.18,2436.18) 351,2371 351.03,2370.97 ccw(c416.18,2436.18) 416.18,2344 2724.71,2344 2729.32,2348.61 v1(2731.96,2348.61) ; v1(2851,2270) 2861,2260 ccw(c2885.14,2284.14) 2885.14,2250 2955.26,2250 ccw(c2955.26,2278.74) 2975.58,2258.42 ccw(c2955.26,2278.74) 2984,2278.74 2984,2324.71 cw(c3015.37,2324.71) 2993.18,2346.88 ccw(c2971.01,2369.08) 3002.38,2369.08 U8.8@3002.38,2384.89
  SIGNAL (Bottom) w8: U8.8@3002.38,2384.89 U8.8@3002.44,2384.95
GPIO5-B: U6.9
GPIO5-C: U8.9
GPIO6-B: U6.11
GPIO6-C: U8.11
HOT1: J1.P4 LED3.2 | length 1785.1
  SIGNAL (Bottom) w6: LED3.2@190.62,2871.11 272.35,2871.11 cw(c272.35,2809.46) 315.91,2853.09 ; 315.98,2853.02 cw(c272.35,2809.46) 334,2809.46 334,2436.18 ccw(c416.18,2436.18) 358.07,2378.07 ; 358.11,2378.04 ccw(c416.18,2436.18) 416.18,2354 1209.58,2354 ccw(c1209.58,2454) 1280.29,2383.29 1284.14,2387.14 ccw(c1213.43,2457.85) 1313.43,2457.85 J1.P4@1313.43,2606.09
HOT2: J2.P4 LED1.2 | length 1750.7
  SIGNAL (Bottom) w6: LED1.2@190.62,1763.13 219.11,1734.65 cw(c185.56,1701.1) 233,1701.1 233,1383.56 ccw(c333,1383.56) 262.29,1312.85 294.85,1280.29 ccw(c365.56,1351) 365.56,1251 1209.58,1251 ccw(c1209.58,1351) 1280.29,1280.29 1284.14,1284.14 ccw(c1213.43,1354.85) 1313.43,1354.85 J2.P4@1313.43,1500.84
HSD1_N: U8.13 U11.10 | length 735.6
  SIGNAL w5.1: v1@2937.03,2420.75 2933.66,2424.11 ccw(c2926.48,2416.93) 2926.48,2427.08 cw(c2926.48,2437.23) 2919.31,2430.05 2917.79,2431.58 cw(c2928.43,2442.22) 2913.38,2442.22 2913.38,2445.52 cw(c2936.14,2445.52) 2920.04,2461.62 2923.77,2465.34 cw(c2934.92,2454.19) 2927.31,2468.01 cw(c2934.92,2454.19) 2934.92,2469.96 ccw(c2934.92,2485.73) 2946.07,2474.58 ; v1@2937.03,2420.75 ccw(c2939,2422.72) v1(2939,2419.93) ; v1@2939.94,2421.76 v1@2941,2421.76 ; 2946.09,2474.6 cw(c2962.36,2458.29) 2962.36,2481.33 3054.18,2481.33 cw(c3054.18,2415.38) 3100.82,2462.01 3101.45,2461.37 cw(c3056.68,2416.6) 3120,2416.6 3120,2265.94 ccw(c3181.94,2265.94) 3138.14,2222.14 3155.75,2204.53 cw(c3106.38,2155.16) 3176.2,2155.16 3176.2,2095.37 ccw(c3188.41,2095.37) 3179.78,2086.73 v1@3182.54,2083.97 ; v1@3182.54,2083.97 cw(c3180.56,2082) v1(3183.35,2082)
  SIGNAL (Bottom) w5.1: U8.13@2907.89,2416.39 2914.02,2416.39 ccw(c2914.02,2418.57) 2915.57,2417.03 ccw(c2914.02,2418.57) 2916.21,2418.57 U8.13@2916.64,2419.37 ; U8.13@2916.65,2419.38 cw(c2921.12,2416.92) 2920.02,2421.9 ccw(c2917.73,2432.13) 2920.87,2422.13 2929.14,2424.72 ; 2929.93,2424.9 cw(c2930.7,2419.86) v1@2934.1,2423.66 ; v1@2934.27,2423.51 ccw(c2937.56,2427.41) 2934.45,2423.37 v1(2939,2419.93) ; U11.10@3179,2034.2 3179,2044.78 ccw(c3174.22,2044.78) 3177.6,2048.16 cw(c3180.98,2051.54) 3176.2,2051.54 3176.2,2068.63 cw(c3188.41,2068.63) v1@3179.78,2077.27
HSD1_P: U8.15 U11.9 | length 670.1
  SIGNAL w5.1: 2932.18,2438.67 cw(c2928.58,2442.28) 2928.58,2437.18 cw(c2928.58,2442.28) 2924.97,2438.68 cw(c2928.58,2442.28) 2923.48,2442.28 2923.48,2445.47 cw(c2936.27,2445.47) 2927.22,2454.52 2928.02,2455.32 cw(c2939,2444.34) 2935.91,2459.55 cw(c2939,2444.34) 2939,2459.86 2939.1,2459.86 ccw(c2939.1,2475.63) 2950.25,2464.48 2952.89,2467.11 cw(c2962.82,2457.18) 2962.82,2471.23 3053.34,2471.23 cw(c3053.34,2413.34) 3094.27,2454.27 cw(c3056.54,2416.54) 3109.9,2416.54 3109.9,2265.9 ccw(c3181.83,2265.9) 3130.92,2215.08 ccw(c3181.83,2265.9) 3130.97,2215.03 3148.5,2197.5 cw(c3106.01,2155.01) 3166.1,2155.01 3166.1,2095.37 cw(c3153.89,2095.37) 3162.52,2086.73 v1@3159.76,2083.97 ; 2932.18,2438.68 v1@2937.03,2443.52 ; v1@2937.03,2443.52 cw(c2939,2441.55) v1(2939,2444.34) ; v1(3158.95,2082) cw(c3161.74,2082) v1@3159.76,2083.97
  SIGNAL (Bottom) w5.1: U8.15@2916.21,2445.69 2916.65,2444.89 ccw(c2921.12,2447.35) 2919.98,2442.38 cw(c2917.73,2432.13) 2923.55,2440.86 2926.39,2438.99 ccw(c2929.2,2443.24) 2931.72,2438.81 ; v1@3162.52,2077.27 cw(c3153.89,2068.63) 3166.1,2068.63 3166.1,2051.54 cw(c3161.32,2051.54) 3164.7,2048.16 ccw(c3168.08,2044.78) 3163.3,2044.78 U11.9@3163.3,2034.2
HSD2_N: J5.2 U11.19 | length 2288.5
  SIGNAL w5.1: 2866.62,3159.91 ccw(c2883.45,3176.77) 2883.45,3152.95 cw(c2883.45,3129.13) 2900.24,3146.02 cw(c2883.45,3129.13) 2900.29,3145.97 2903.9,3142.36 2909.58,3136.68 ccw(c2930.9,3158) 2930.93,3127.85 2931.03,3127.85 cw(c2931.04,3122.75) 2931.37,3127.84 2944.44,3127 2969.62,3127 cw(c2969.62,3098.32) 2974.05,3126.66 cw(c2969.62,3098.32) J5.2@2989.9,3118.6 ; 2866.61,3159.93 2862.75,3163.78 cw(c2872.05,3173.08) 2858.9,3173.08 2858.9,3422.44 cw(c2923.46,3422.44) 2877.81,3468.09 2877.99,3468.27 cw(c2923.64,3422.62) 2878.06,3468.34 cw(c2923.64,3422.62) 2923.64,3487.18 3188.74,3487.18 cw(c3188.74,3409.06) 3243.98,3464.3 3244.15,3464.13 ; 3244.18,3464.1 cw(c3188.75,3408.73) 3267.1,3408.73 3267.1,2840.82 ccw(c3333.82,2840.82) 3286.64,2793.64 3307.87,2772.42 cw(c3249.97,2714.52) 3331.85,2714.52 3331.85,2238.24 cw(c3306.76,2238.24) 3324.5,2220.5 ccw(c3340.43,2204.57) 3317.9,2204.57 3317.9,2093.37 ccw(c3330.11,2093.37) v1@3321.48,2084.73
  SIGNAL (Bottom) w5.1: U11.19@3320.7,2034.2 3320.7,2044.78 ccw(c3315.92,2044.78) 3319.3,2048.16 cw(c3322.68,2051.54) 3317.9,2051.54 3317.9,2066.63 cw(c3330.11,2066.63) 3321.48,2075.27 v1@3324.24,2078.03 ; v1@3324.24,2078.03 ccw(c3322.26,2080) v1(3325.05,2080)
HSD2_P: J5.3 U11.18 | length 2290.3
  SIGNAL w5.1: 2873.36,3167.45 cw(c2883.96,3178.01) 2869,3178.01 2869,3422.31 cw(c2923.77,3422.31) 2885.02,3461.02 ; 2873.4,3167.41 ccw(c2883.96,3178.01) 2883.96,3163.05 2885.54,3163.05 ccw(c2885.54,3181.82) 2898.81,3168.55 2903.87,3173.61 ; 2885.07,3461.07 cw(c2923.77,3422.31) 2923.77,3477.08 3188.57,3477.08 cw(c3188.57,3408.66) 3236.96,3457.04 cw(c3188.57,3408.66) 3257,3408.66 3257,3396 3257,3353 3247,3343 3247,3328 3257,3318 3257,3303 3247,3293 3247,3278 3257,3268 3257,3253 3247,3243 3247,3228 3257,3218 3257,3159.5 3247,3149.5 3247,3134.5 3257,3124.5 3257,3109.5 3247,3099.5 3247,3084.5 3257,3074.5 3257,3059.5 3247,3049.5 3247,3034.5 3257,3024.5 3257,2996 3257,2840.78 ccw(c3333.71,2840.78) 3279.42,2786.58 ccw(c3333.71,2840.78) 3279.47,2786.53 3300.61,2765.39 cw(c3249.57,2714.36) 3321.75,2714.36 3321.75,2238.32 cw(c3306.57,2238.32) 3317.3,2227.59 ccw(c3340.24,2204.65) 3307.8,2204.65 3307.8,2093.37 cw(c3295.59,2093.37) v1@3304.22,2084.73 ; 2903.9,3173.64 2909.58,3179.32 ; 2909.61,3179.35 cw(c2930.9,3158) 2922.72,3187.02 2924.69,3187.57 cw(c2935,3151) 2935,3189 2969.62,3189 ccw(c2969.62,3217.68) 2974.05,3189.34 ccw(c2969.62,3217.68) J5.3@2989.9,3197.4
  SIGNAL (Bottom) w5.1: v1(3300.65,2080) ccw(c3303.44,2080) v1@3301.46,2078.03 ; v1@3301.46,2078.03 3304.22,2075.27 cw(c3295.59,2066.63) 3307.8,2066.63 3307.8,2051.54 cw(c3303.02,2051.54) 3306.4,2048.16 ccw(c3309.78,2044.78) 3305,2044.78 U11.18@3305,2034.2
HSD3_N: J4.2 U11.23 | length 2253.3
  SIGNAL w5.1: 3334.27,2798.73 cw(c3400.61,2865) 3306.84,2865 3306.84,3392.32 cw(c3383.63,3392.32) 3306.84,3392.44 cw(c3383.63,3392.32) 3329.25,3446.53 cw(c3383.63,3392.32) 3329.33,3446.62 3338.9,3456.18 cw(c3415.76,3379.32) 3338.99,3456.27 cw(c3415.76,3379.32) 3415.76,3488.02 3522.62,3488.02 cw(c3522.62,3420.88) 3570.09,3468.35 3570.26,3468.19 cw(c3522.64,3420.58) 3589.98,3420.58 3589.98,3198.41 cw(c3560.64,3198.41) 3581.39,3177.67 3573.32,3169.6 cw(c3547.4,3195.53) 3547.4,3158.87 3534.11,3158.87 ccw(c3534.11,3148.65) 3526.89,3155.87 cw(c3519.83,3162.94) 3519.83,3152.95 3502.28,3152.95 ccw(c3502.28,3147.85) 3498.67,3151.46 ccw(c3502.28,3147.85) 3497.18,3147.85 J4.2@3497.18,3118.6 ; 3334.31,2798.69 3337.38,2795.62 cw(c3277.94,2736.18) 3362,2736.18 3362,1982.49 ccw(c3395.29,1982.49) 3363.5,1972.62 ccw(c3395.29,1982.49) 3371.75,1958.96 3373.27,1957.44 ccw(c3380.47,1964.64) 3380.47,1954.45 cw(c3380.47,1944.27) v1@3387.67,1951.48 ; v1@3387.67,1951.47 3391.03,1948.12 ccw(c3393,1950.09) v1(3393,1947.3)
  SIGNAL (Bottom) w5.1: U11.23@3354.2,1953.5 3364.78,1953.5 ccw(c3364.78,1958.28) 3368.16,1954.9 cw(c3371.54,1951.52) 3371.54,1956.3 3379.63,1956.3 cw(c3379.63,1944.09) v1@3388.27,1952.72
HSD3_P: J4.3 U11.22 | length 2255.3
  SIGNAL w5.1: v1(3392.97,1971.71) ccw(c3392.97,1968.92) 3391,1970.89 3386.15,1966.05 cw(c3382.55,1969.65) 3382.55,1964.55 cw(c3382.55,1969.65) 3378.94,1966.05 cw(c3395.46,1982.56) 3373.18,1975.53 cw(c3395.46,1982.56) 3372.1,1982.56 3372.1,2736.36 ccw(c3278.37,2736.36) 3344.65,2802.64 3344.41,2802.88 cw(c3410.71,2869.18) 3316.94,2869.18 3316.94,2905 3316.94,2920 3326.94,2930 3326.94,2945 3316.94,2955 3316.94,2970 3326.94,2980 3326.94,2995 3316.94,3005 3316.94,3020 3326.94,3030 3326.94,3045 3316.94,3055 3316.94,3070 3326.94,3080 3326.94,3095 3316.94,3105 3316.94,3120 3326.94,3130 3326.94,3145 3316.94,3155 3316.94,3176 3326.94,3186 3326.94,3201 3316.94,3211 3316.94,3226 3326.94,3236 3326.94,3251 3316.94,3261 3316.94,3276 3326.94,3286 3326.94,3301 3316.94,3311 3316.94,3360 3316.94,3392.28 cw(c3383.72,3392.28) 3336.5,3439.5 3345.93,3448.93 cw(c3415.92,3378.95) 3415.92,3477.92 3522.46,3477.92 cw(c3522.46,3420.5) 3563.05,3461.12 ; J4.3@3497.18,3197.4 3497.18,3168.15 ccw(c3502.28,3168.15) 3498.67,3164.54 ccw(c3502.28,3168.15) 3502.28,3163.05 3515.6,3163.05 ccw(c3515.6,3173.15) 3522.74,3166.01 cw(c3529.88,3158.87) 3529.88,3168.97 3544.14,3168.97 ccw(c3544.14,3203.39) 3568.49,3179.05 3574.18,3184.75 ccw(c3560.43,3198.5) 3579.88,3198.5 3579.88,3420.5 ccw(c3522.46,3420.5) 3563.08,3461.09
  SIGNAL (Bottom) w5.1: U11.22@3354.2,1969.2 3364.78,1969.2 cw(c3364.78,1964.42) 3368.16,1967.8 ccw(c3371.54,1971.18) 3371.54,1966.4 3379.63,1966.4 ccw(c3379.63,1978.61) v1@3388.27,1969.98
HSD4_N: U6.13 U11.38 | length 967.7
  SIGNAL w5.1: v1@3508.92,1716.81 cw(c3516.85,1708.88) 3516.85,1720.1 3540.04,1720.1 ccw(c3540.04,1770.94) 3575.99,1734.99 3596.8,1755.8 ccw(c3545.38,1807.22) 3618.1,1807.22 3618.1,2335.5 3618.1,2350.5 3628.1,2360.5 3628.1,2375.5 3618.1,2385.5 3618.1,2412.5 ; v1@3621.18,2415.01 ccw(c3628.6,2407.58) 3618.1,2407.58 cw(c3635.56,2407.58) v1(3623.21,2419.93)
  SIGNAL (Bottom) w5.1: U11.38@3354.2,1717.3 3364.78,1717.3 ccw(c3364.78,1722.08) 3368.16,1718.7 cw(c3371.54,1715.32) 3371.54,1720.1 3490.63,1720.1 cw(c3490.63,1707.89) 3499.27,1716.52 v1@3502.03,1713.76 ; v1@3502.03,1713.76 ccw(c3504,1715.74) v1(3504,1712.95) ; U6.13@3597.89,2416.39 3604.02,2416.39 ccw(c3604.02,2418.57) 3605.57,2417.03 ccw(c3604.02,2418.57) 3606.21,2418.57 U6.13@3606.64,2419.37 ; U6.13@3606.65,2419.38 cw(c3611.12,2416.92) 3610.02,2421.9 ccw(c3607.73,2432.13) 3613.57,2423.42 ; 3613.58,2423.43 cw(c3616.39,2419.17) 3615.48,2424.19
HSD4_P: U6.15 U11.37 | length 948.6
  SIGNAL w5.1: v1@3508.92,1733.49 ccw(c3516.85,1741.42) 3516.85,1730.2 3535.86,1730.2 ccw(c3535.86,1781.04) 3571.81,1745.09 3586.7,1759.98 ccw(c3535.28,1811.41) 3608,1811.41 3608,2417 ccw(c3602.9,2417) 3607.95,2417.74 cw(c3623.21,2419.93) 3608,2422.47 cw(c3624.07,2422.47) 3612.71,2433.83 v1(3623.21,2444.34)
  SIGNAL (Bottom) w5.1: U11.37@3354.2,1733 3364.78,1733 cw(c3364.78,1728.22) 3368.16,1731.6 ccw(c3371.54,1734.98) 3371.54,1730.2 3490.63,1730.2 ccw(c3490.63,1742.41) 3499.27,1733.78 v1@3502.03,1736.54 ; v1@3502.03,1736.54 cw(c3504,1734.56) v1(3504,1737.35) ; U6.15@3606.21,2445.69 3606.65,2444.89 ccw(c3611.12,2447.35) 3609.98,2442.38 cw(c3607.73,2432.13) 3613.59,2440.83 ccw(c3616.39,2445.1) 3615.49,2440.08
IN_CC1: J3.A5 U10.1 | length 3492.6
  SIGNAL w5.1: v1(2480,1345) ccw(c2517.24,1382.24) 2488.11,1338.37 2497.47,1332.15 ccw(c2506,1345) 2506,1329.58 3866.02,1329.58 ccw(c3866.02,1429.58) 3936.73,1358.87 4031.73,1453.86 ccw(c3987.12,1498.56) 4031.82,1453.95 ccw(c3987.12,1498.56) 4044.08,1471.29 4047.12,1477.62 ccw(c4018.62,1491.38) 4050.27,1491.38 4050.27,1494.79 cw(c4104.32,1494.79) 4066.09,1533 4089.52,1556.42 ccw(c4037.18,1608.82) 4089.61,1556.51 ccw(c4037.18,1608.82) 4111.24,1608.82 4111.24,2931.76 v1(4111,2932) ; J3.A5@3958.34,3187.53 4031.12,3187.53 cw(c4031.12,3145.65) 4060.71,3175.29 ; 4060.74,3175.26 v1(4073,3163)
  SIGNAL (Bottom) w5.1: U10.1@2478.07,1363.14 2478.61,1363.14 2480,1361.75 v1(2480,1345) ; v1(4073,3163) 4088.84,3147.16 cw(c4050.6,3108.93) 4104.68,3108.93 4104.68,2947.27 ccw(c4126.27,2947.27) 4106.58,2938.41 ccw(c4126.27,2947.27) v1(4111,2932)
IN_CC2: J3.B5 U10.28 | length 3501.1
  SIGNAL w5.1: v1(2506,1345) ccw(c2521.27,1360.27) 2512.41,1340.58 ccw(c2521.27,1360.27) 2521.27,1338.68 3862.25,1338.68 ccw(c3862.25,1438.68) 3932.97,1367.97 4025.34,1460.34 ccw(c3987.12,1498.56) 4041.17,1498.56 cw(c4095.22,1498.56) 4056.99,1536.77 ; v1(3869.26,3124.2) cw(c3879.57,3113.88) 3875.96,3128.01 cw(c3879.57,3113.88) 3879.57,3128.47 J3.B5@3901.65,3128.47 ; 4057,1536.78 4083.11,1562.89 ccw(c4037.18,1608.82) 4083.15,1562.92 ccw(c4037.18,1608.82) 4102.14,1608.82 4102.14,2869 ; v1(4094.3,2914.2) cw(c4075.71,2895.61) 4100.03,2905.58 cw(c4075.71,2895.61) 4102,2895.61 4102,2869
  SIGNAL (Bottom) w5.1: v1(2506,1345) 2519.98,1345 2521.37,1346.39 U10.28@2521.37,1347.38 ; v1(3869.26,3124.2) 3870.76,3125.7 4013.16,3125.7 cw(c4013.16,3043.29) 4071.42,3101.58 ; 4071.46,3101.54 cw(c4013.16,3043.29) 4095.58,3043.29 4095.58,2915.86 v1@4094.55,2914.45
IN_SSRX1_N: J3.B11 U10.7 U12.2 U12.9 | length 3686.7
  SIGNAL w5.1: v1(2374.3,1487.3) cw(c2372.32,1485.32) 2375.12,1485.32 ccw(c2396.75,1485.32) 2380.82,1470.69 ccw(c2396.75,1485.32) 2381.45,1470.03 ccw(c2418.26,1506.84) 2418.26,1454.78 2610.5,1454.78 2617.33,1447.95 3748.67,1447.95 ccw(c3748.67,1543.33) 3816.08,1475.85 ccw(c3748.67,1543.33) 3816.11,1475.89 3873.8,1533.57 ; 3863.18,3224.86 cw(c3839.58,3248.5) 3839.58,3215.1 3804.81,3215.1 ccw(c3804.81,3148.2) 3757.56,3195.56 ccw(c3804.81,3148.2) 3757.51,3195.51 3757.45,3195.45 ccw(c3804.76,3148.15) 3757.38,3195.38 ccw(c3804.76,3148.15) 3737.86,3148.26 ccw(c3804.76,3148.15) 3737.86,3148.15 3737.86,3023.36 ccw(c3805.31,3023.36) 3757.56,2975.73 ccw(c3805.31,3023.36) 3757.61,2975.67 3760.62,2972.66 ccw(c3815.58,3027.62) 3760.67,2972.61 ccw(c3815.58,3027.62) 3815.58,2949.9 3867.16,2949.9 cw(c3867.16,2934.01) 3878.4,2945.25 3883.06,2940.59 cw(c3860.58,2918.11) 3892.37,2918.11 3892.37,2904.57 cw(c3882.17,2904.57) 3889.38,2897.36 3888.96,2897.36 3888.27,2896.66 ccw(c3889.94,2894.99) 3887.57,2894.99 U12.2@3887.57,2888.78 3887.57,2882.58 ccw(c3889.94,2882.58) 3888.27,2880.9 3888.96,2880.21 3889.38,2880.21 cw(c3882.17,2873) 3892.37,2873 3892.37,2869.58 cw(c3887.27,2869.58) 3890.87,2865.98 3889.38,2864.48 3888.96,2864.48 ccw(c3892.31,2861.13) 3887.57,2861.13 U12.9@3887.57,2855.91 3887.57,2850.69 ccw(c3892.31,2850.69) 3888.96,2847.34 3889.38,2847.34 3890.87,2845.84 cw(c3887.27,2842.24) 3892.37,2842.24 3892.37,2827 ccw(c3928.94,2827) 3903.04,2801.17 ccw(c3928.94,2827) 3903.08,2801.14 3948.01,2756.21 cw(c3877.3,2685.5) 3977.3,2685.5 3977.3,2685 3977.3,2631 3967.3,2621 3967.3,2606 3977.3,2596 3977.3,2581 3967.3,2571 3967.3,2556 3977.3,2546 3977.3,2531 3977.3,2288.1 cw(c3877.3,2288.1) 3948.01,2217.39 3924.6,2193.99 3908.77,2178.16 ccw(c3958.76,2128.16) 3888.06,2128.16 3888.06,1568 cw(c3839.37,1568) 3873.82,1533.59 ; 3863.2,3224.88 3872.98,3234.67 3879.96,3239.36 3881.67,3240.51 ccw(c3878.82,3244.73) 3882.4,3241.1 ccw(c3878.82,3244.73) 3882.44,3241.15 cw(c3895.56,3228.04) 3895.56,3246.58 J3.B11@3901.65,3246.58
  SIGNAL (Bottom) w5.1: v1@2375.12,1481.42 ccw(c2387.33,1481.42) 2378.69,1472.79 2383.37,1468.11 ccw(c2415.51,1500.28) 2415.51,1454.8 2463.4,1454.8 ccw(c2463.4,1459.63) 2466.81,1456.22 cw(c2470.23,1452.81) 2470.23,1457.63 U10.7@2478.07,1457.63
IN_SSRX1_P: J3.B10 U10.6 U12.1 U12.10 | length 3681.9
  SIGNAL w5.1: v1(2357.04,1470.04) ccw(c2359.01,1472.01) 2359.01,1469.22 cw(c2359.01,1447.59) 2374.31,1462.88 2374.36,1462.84 ccw(c2418.19,1506.67) 2418.19,1444.68 2606.32,1444.68 2613.15,1437.85 3748.72,1437.85 ccw(c3748.72,1543.2) 3823.22,1468.71 3880.99,1526.48 ccw(c3839.55,1567.93) 3898.16,1567.93 3898.16,2128.11 cw(c3958.89,2128.11) 3915.92,2171.02 ; 3764.77,2982.79 cw(c3805.47,3023.43) 3747.96,3023.43 3747.96,3148.11 cw(c3804.85,3148.11) 3764.62,3188.34 cw(c3804.85,3148.11) 3804.85,3205 3840.45,3205 ccw(c3840.45,3246.41) 3869.73,3217.13 cw(c3890.23,3196.63) 3890.23,3225.62 3898.56,3225.62 ccw(c3898.56,3229.99) J3.B10@3901.65,3226.9 ; 3764.8,2982.76 ccw(c3819.76,3037.72) 3764.85,2982.71 ccw(c3819.76,3037.72) 3819.76,2960 3867.26,2960 cw(c3867.26,2934.24) 3885.47,2952.46 3893.16,2944.77 cw(c3870.68,2922.3) 3902.47,2922.3 3902.47,2904.57 ccw(c3912.67,2904.57) 3905.45,2897.36 3905.87,2897.36 3906.57,2896.66 cw(c3904.89,2894.99) 3907.26,2894.99 U12.1@3907.26,2888.78 3907.26,2882.58 cw(c3904.89,2882.58) 3906.57,2880.9 3905.87,2880.21 3905.45,2880.21 ccw(c3912.67,2873) 3902.47,2873 3902.47,2869.58 ccw(c3907.57,2869.58) 3903.96,2865.98 3905.45,2864.48 3905.87,2864.48 cw(c3902.52,2861.13) 3907.26,2861.13 U12.10@3907.26,2855.91 3907.26,2850.69 cw(c3902.52,2850.69) U12.10@3905.88,2847.34 ; U12.10@3905.87,2847.34 3905.45,2847.34 3903.96,2845.84 ccw(c3907.57,2842.24) 3902.47,2842.24 3902.47,2827.04 ccw(c3929.05,2827.04) 3910.25,2808.25 3955.24,2763.26 cw(c3877.62,2685.63) 3987.4,2685.63 3987.4,2288.05 cw(c3877.42,2288.05) 3955.24,2210.35 cw(c3877.42,2288.05) 3955.19,2210.29 3915.95,2171.05
  SIGNAL (Bottom) w5.1: v1@2362.92,1469.22 cw(c2362.92,1457.01) 2371.51,1465.68 cw(c2362.92,1457.01) 2371.55,1465.64 2377.69,1459.5 ccw(c2413.42,1495.23) 2413.42,1444.7 2463.4,1444.7 cw(c2463.4,1439.88) 2466.81,1443.29 ccw(c2470.23,1446.7) 2470.23,1441.88 U10.6@2478.07,1441.88
IN_SSRX2_N: J3.A11 U10.9 U12.5 U12.6 | length 3387.3
  SIGNAL w5.1: v1(2430,1503) cw(c2428.03,1501.03) 2430.82,1501.03 2430.82,1494.69 ccw(c2437.16,1494.69) 2432.47,1490.43 ccw(c2437.16,1494.69) 2432.68,1490.21 ccw(c2437.16,1494.69) 2437.16,1488.35 3399.35,1488.35 3406.64,1495.64 3731.54,1495.64 ccw(c3731.54,1568.46) 3783,1516.94 ; 3783.03,1516.97 3826.03,1559.97 ccw(c3780.01,1605.99) 3845.09,1605.99 3845.09,1629.5 3845.09,1644.5 3835.09,1654.5 3835.09,1669.5 3845.09,1679.5 3845.09,1694.5 3835.09,1704.5 3835.09,1719.5 3845.09,1729.5 3845.09,1775.5 3845.09,2169.67 cw(c3879.89,2169.67) 3845.09,2169.76 cw(c3879.89,2169.67) 3855.23,2194.23 cw(c3879.89,2169.67) 3855.28,2194.28 3862.54,2201.54 ccw(c3820.4,2243.69) 3880,2243.69 3880,2254.94 3880,2269.94 3870,2279.94 3870,2294.94 3880,2304.94 3880,2319.94 3870,2329.94 3870,2344.94 3880,2354.94 3880,2369.94 3870,2379.94 3870,2394.94 3880,2404.94 3880,2465 3880,2481.2 ccw(c3857.31,2481.2) 3873.35,2497.25 3869.97,2500.64 cw(c3892.12,2522.79) 3860.79,2522.79 3860.79,2591.71 cw(c3880.99,2591.71) 3860.79,2591.77 cw(c3880.99,2591.71) 3866.68,2605.96 ccw(c3856.55,2616.13) 3870.9,2616.13 3870.9,2752.54 ccw(c3830.5,2752.54) 3859.07,2781.11 3845.03,2795.14 cw(c3873.33,2823.44) 3844.99,2795.18 cw(c3873.33,2823.44) 3833.31,2823.44 3833.31,2840.12 ccw(c3823.11,2840.12) U12.6@3830.33,2847.33 ; v1@3829.74,2927.27 cw(c3821.1,2918.63) 3833.31,2918.63 3833.31,2904.57 cw(c3823.11,2904.57) 3830.32,2897.36 3829.91,2897.36 3829.21,2896.66 ccw(c3830.89,2894.99) 3828.52,2894.99 U12.5@3828.52,2888.78 3828.52,2882.58 ccw(c3830.89,2882.58) 3829.21,2880.9 3829.91,2880.21 3830.32,2880.21 cw(c3823.11,2873) 3833.31,2873 3833.31,2869.58 cw(c3828.21,2869.58) 3831.82,2865.98 3830.32,2864.48 3829.91,2864.48 ccw(c3833.26,2861.13) 3828.52,2861.13 U12.6@3828.52,2855.91 3828.52,2849.7 ccw(c3830.89,2849.7) 3829.21,2848.03 3829.91,2847.34 U12.6@3830.32,2847.34 ; J3.A11@3958.34,3069.42 3968.74,3069.42 ccw(c3968.74,3077.6) 3974.52,3071.81 cw(c3980.3,3066.03) 3980.3,3074.21 ccw(c3980.3,3079.31) 3984.51,3076.43 3988.19,3081.76 cw(c4014.64,3063.51) 3991.86,3086.18 cw(c4014.64,3063.51) 3991.97,3086.29 cw(c4014.64,3063.51) 4014.64,3095.65 4038.91,3095.65 cw(c4038.91,3082.52) 4048.18,3091.82 cw(c4034.91,3078.52) 4053.7,3078.52 4053.7,3033.95 cw(c3998.75,3033.95) 4037.63,2995.11 ; v1(3991,2982.15) cw(c3991,2979.36) 3992.97,2981.34 ccw(c4008.27,2996.63) 4006.1,2975.11 ccw(c4008.27,2996.63) 4008.27,2975 ccw(c4008.27,2997.31) 4024.03,2981.52 ; 4024.05,2981.53 4037.61,2995.09
  SIGNAL (Bottom) w5.1: v1@2430.82,1496.14 ccw(c2440.67,1496.14) 2433.7,1489.18 ccw(c2440.67,1496.14) 2433.93,1488.96 ccw(c2440.67,1496.14) 2440.67,1486.29 2463.4,1486.29 ccw(c2463.4,1491.12) 2466.81,1487.71 cw(c2470.23,1484.3) 2470.23,1489.12 U10.9@2478.07,1489.12 ; v1(3826.16,2932) cw(c3828.95,2932) v1@3826.98,2933.97 ; v1@3826.98,2933.97 3829.46,2936.46 ccw(c3820.16,2945.76) 3833.31,2945.76 cw(c3846.46,2945.76) 3837.16,2955.06 3845.24,2963.13 cw(c3873.9,2934.47) 3845.3,2963.19 cw(c3873.9,2934.47) 3873.9,2975 3973.73,2975 ccw(c3973.73,2996.63) 3989.03,2981.34 cw(c3991,2979.36) v1(3991,2982.15)